# Altium PCB PCB1.PcbDoc
Units mm, origin at the board's own origin, x right, y up, seen from the top; angles counter-clockwise.
Board outline 30.99 x 36.45 mm, 2 copper layers (Top Layer, Bottom Layer); 8 components, 6 nets, 22 pads, 0 vias.
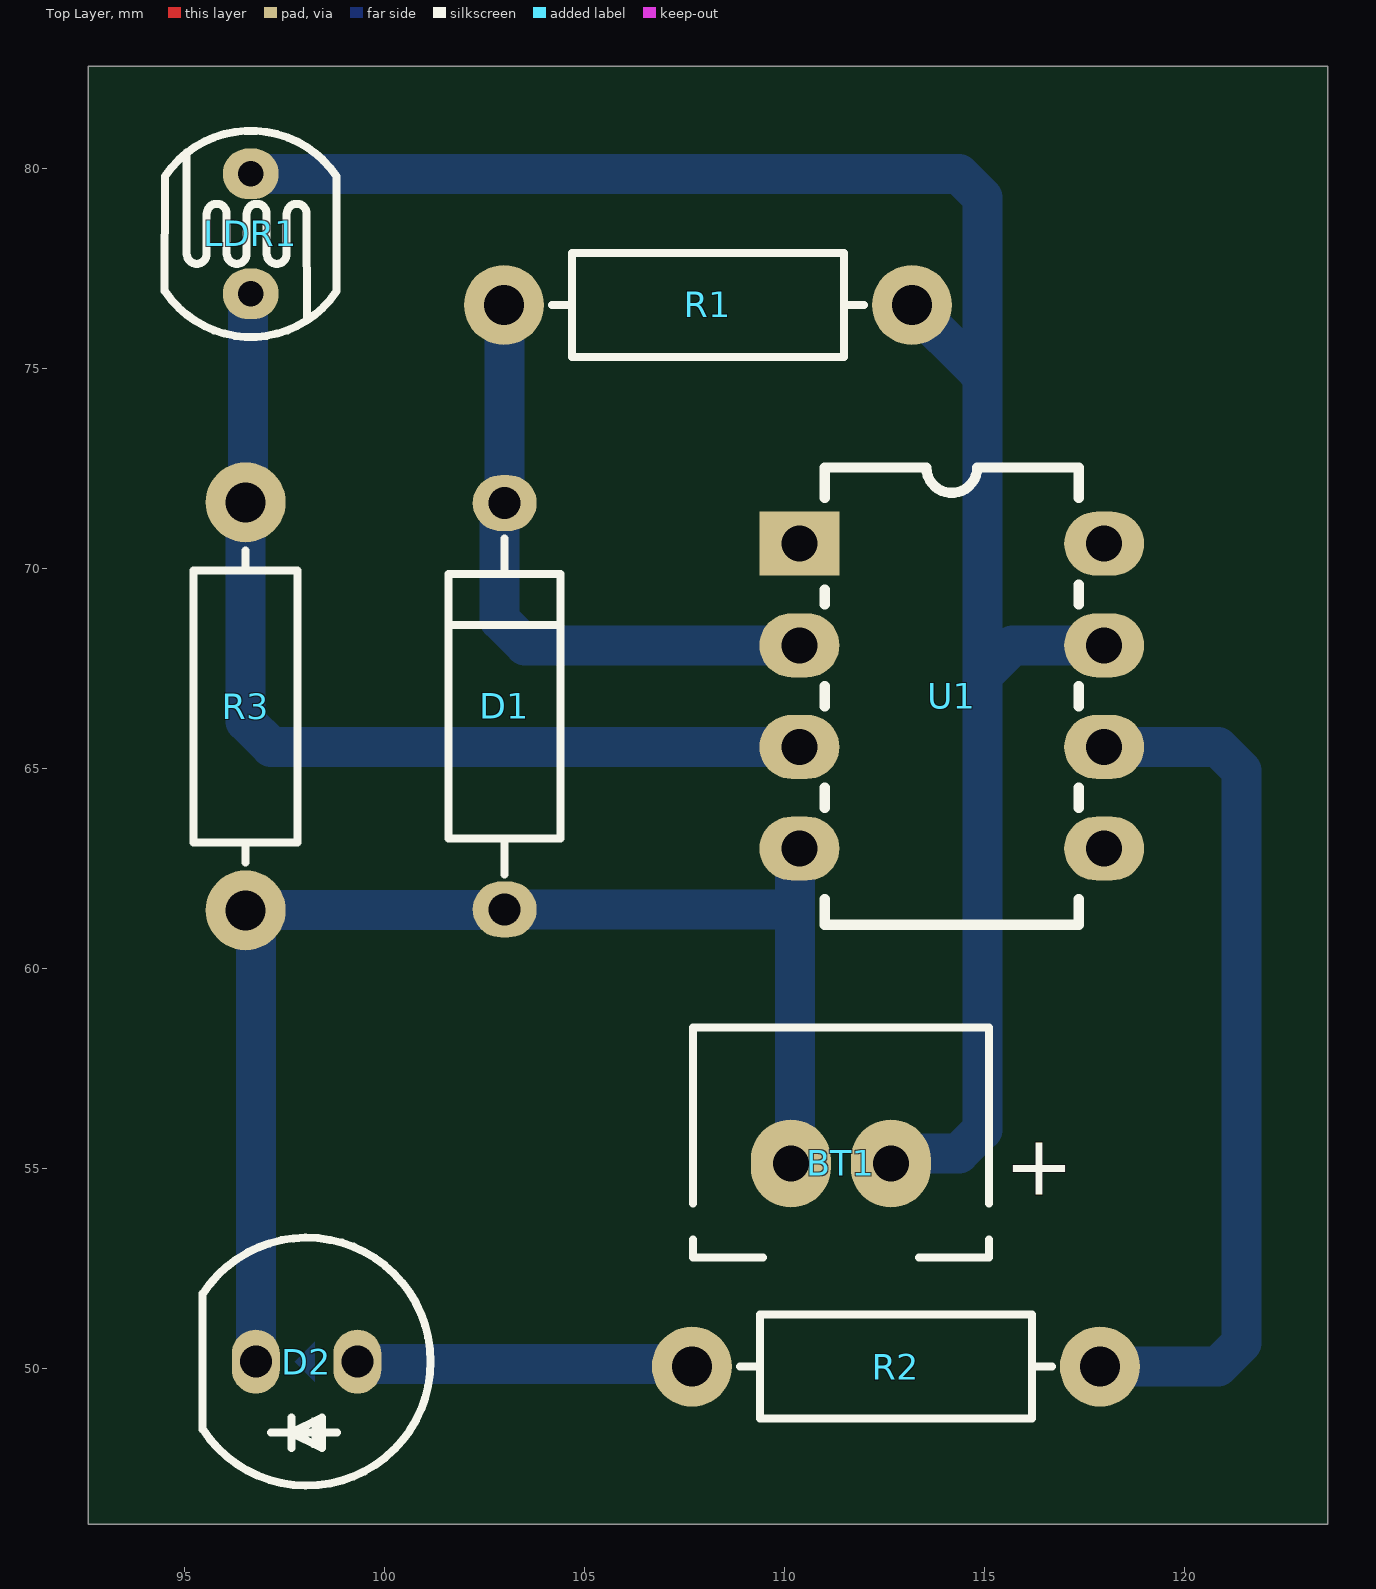
[diagram p0: Top Layer view]
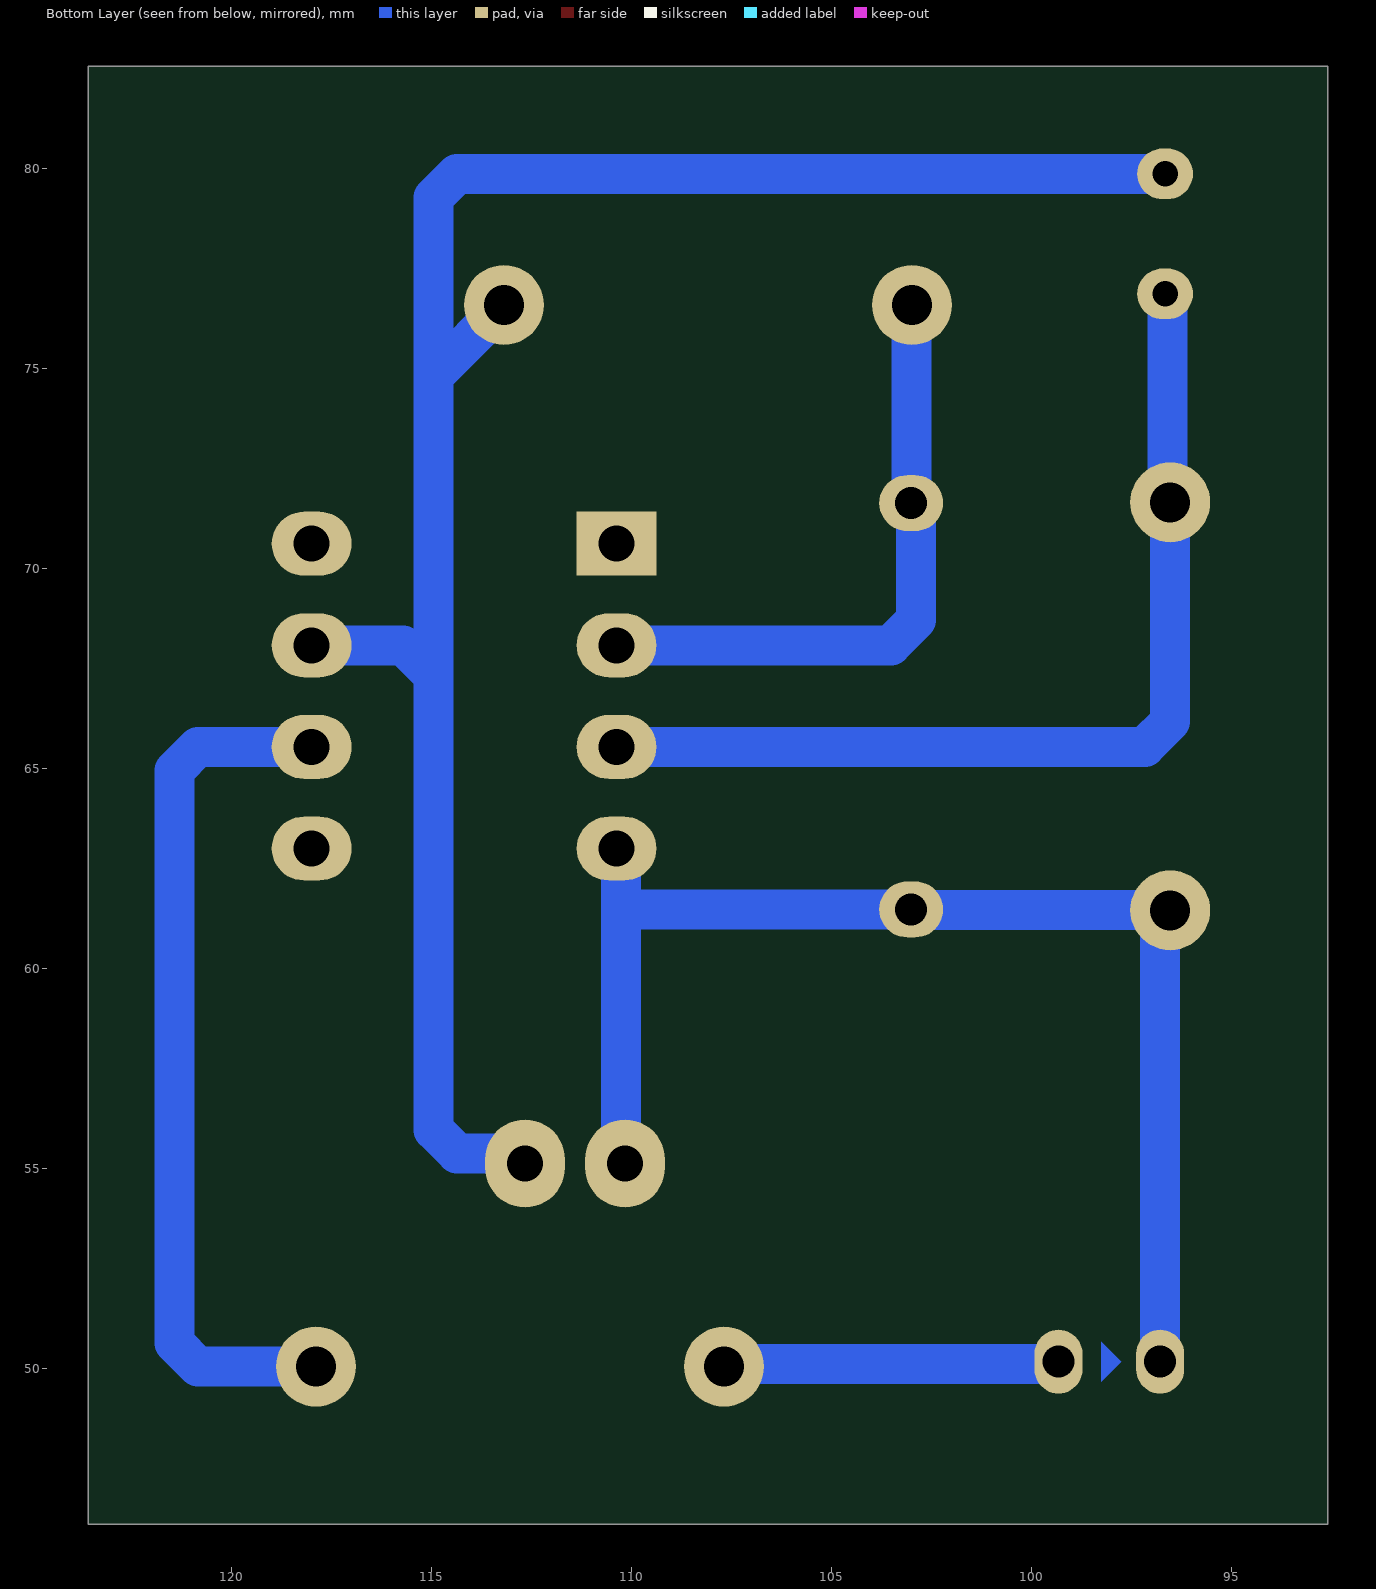
[diagram p1: Bottom Layer view, seen from below]
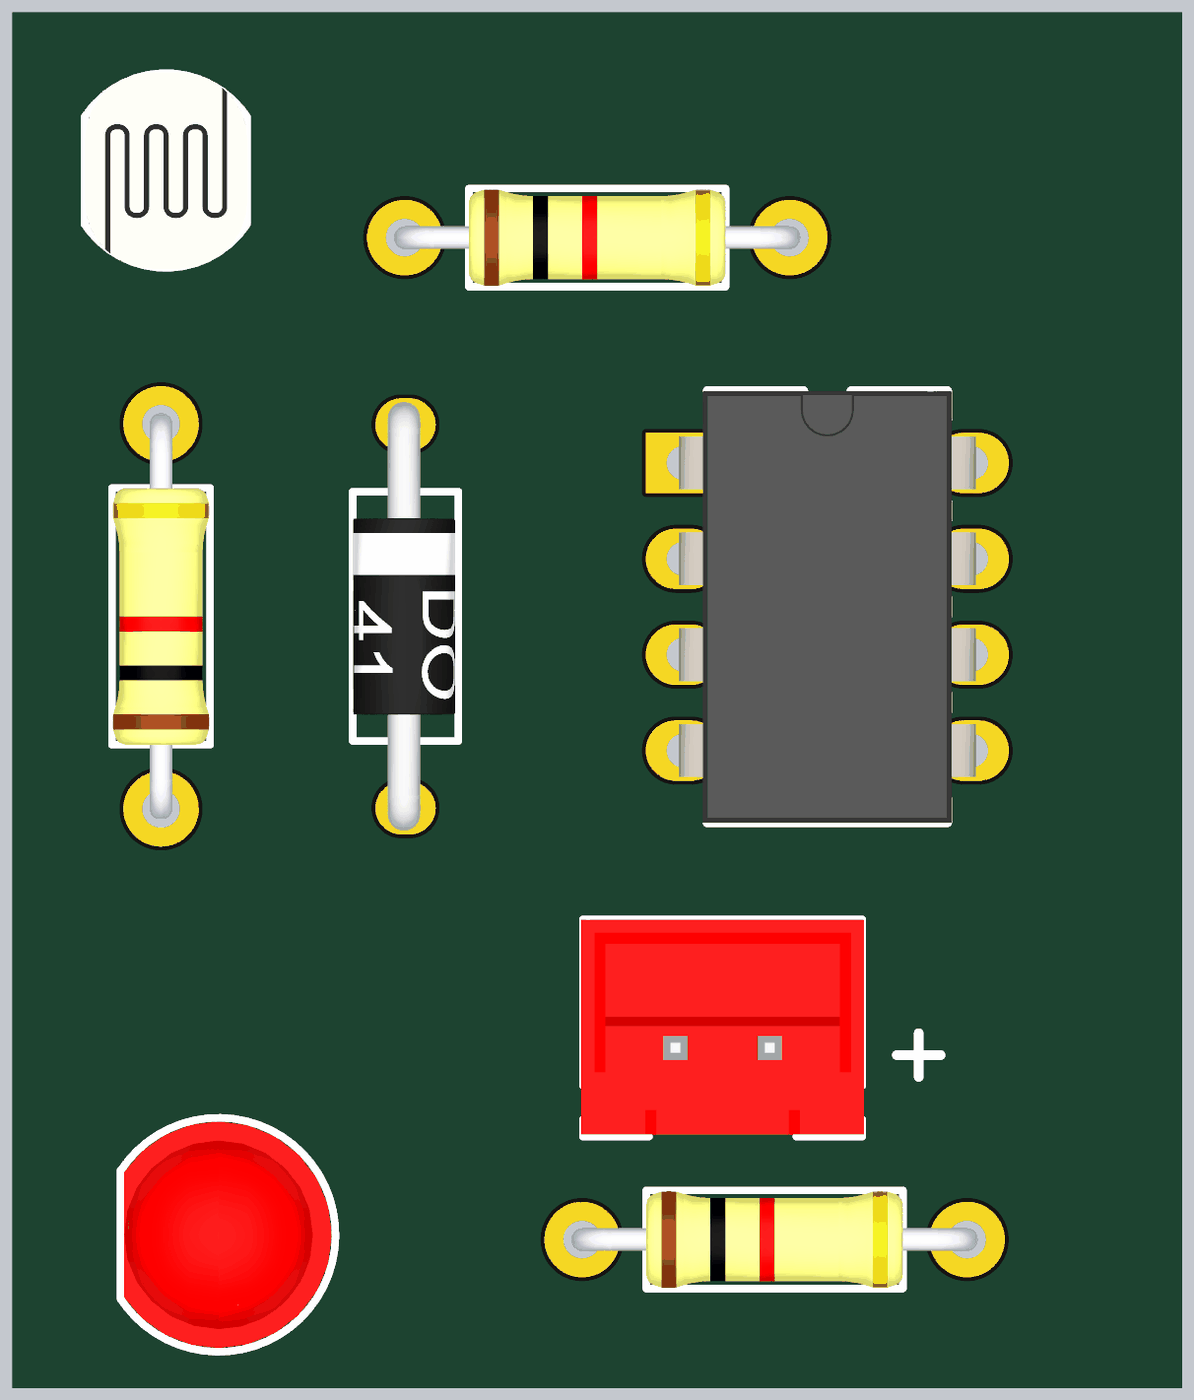
[diagram p2: 3D render of the assembled board from above, using the file's embedded part models]

## Layer stack, top to bottom
Top Solder: solder mask 0.0102, Solder Resist, Dk 3.5
Top Layer: signal copper 0.0356
Dielectric 1: dielectric 0.32, FR-4, Dk 4.8
Bottom Layer: signal copper 0.0356
Bottom Solder: solder mask 0.0102, Solder Resist, Dk 3.5

## Board outline
92.583,46.101 123.571,46.101 123.571,82.55 92.583,82.55

## Design rules (kind name [scope] priority, off if disabled: settings)
Clearance [All] p1: gap=0.254 ignorepadtopadclearanceinfootprint=FALSE
PolygonConnect [All] p1: connectstyle=Relief reliefconductorwidth=0.254 reliefentries=4 polygonreliefangle="90 Angle" airgapwidth=0.254
RoutingVias [All] p1: holewidth=0.711 width=1.27 viastyle="Through Hole" minholewidth=0.711 minwidth=1.27 maxholewidth=0.711 maxwidth=1.27
SolderMaskExpansion [All] p1: expansion=0.102 istentingtop=FALSE
Width [All] p1: maxlimit=1 minlimit=0.254 preferedwidth=1
30 further rules are at their usual default settings.

## Components (designator, comment, footprint, x,y, rotation, side; value= is the part's Value field where it differs from the comment)
BT1 "9V" XH02_Batt 110.149,55.118 r0 top
D1 "ZENER15V" D_AX04_DO41 102.997,66.548 r90 top
D2 "LED5MM_RED" LED5MM_RED 98.044,50.165 r180 top
LDR1 "PhotoCell" PhotoCell 96.647,78.359 r90 top
R1 "3.3K" R025W_AX04 108.077,76.581 r0 top
R2 "10K" R025W_AX04 112.776,50.038 r0 top
R3 "10K" R025W_AX04 96.52,66.548 r90 top
U1 "LM741" CDIP8 114.173,66.802 r0 top

## Footprints (in the part's own frame and the unit in brackets; to place one, negate y for a bottom-side part, rotate by r counter-clockwise, add the part's x,y. Pads: shape width x height; smd on the part's side, far side on the other; paste and mask are expansions set on the pad)
CDIP8 [mm] "8-Pin Ceramic DIP (DD8) NARROW_(300mil width) - 100mil pitch"
  rect 2x1.6 hole 0.9: 1(-3.81,3.81)
  oval 2x1.6 hole 0.9: 2(-3.81,1.27) 3(-3.81,-1.27) 4(-3.81,-3.81) 5(3.81,-3.81) 6(3.81,-1.27) 7(3.81,1.27) 8(3.81,3.81)
  silkscreen extent -3.17,-5.71 3.17,5.71, body extent -3.94,-5.71 3.93,5.71, height 4
D_AX04_DO41 [mm] "DIODE 0.4 INCH SPACING DO-41"
  oval 1.4x1.6 hole 0.8: 1(-5.08,0) 2(5.08,0)
  silkscreen extent -4.2,-1.4 4.2,1.4, body extent -5.68,-1.32 5.68,1.4, height 2.85
LED5MM_RED [mm] "LED THD 5MM RED"
  oval 1.2x1.6 hole 0.8: 1(-1.27,0) 2(1.27,0)
  Bottom Layer region: -0.2,0.5 -0.2,-0.5 0.3,0
  silkscreen extent -3.1,-3.1 2.6,3.1, body extent -3,-3 2.5,3, height 9.14
PhotoCell [mm]
  oval 1.27x1.397 hole 0.635: 1(-1.5,0) 2(1.5,0)
  silkscreen extent -2.58,-2.15 2.58,2.15, body extent -2.61,-2.16 2.61,2.14, height 2.44
R025W_AX04 [mm] "RESISTOR 1/4 WATT, AXIAL0.4"
  round 2 hole 1: 1(-5.1,0) 2(5.1,0)
  silkscreen extent -3.9,-1.3 3.9,1.3, body extent -5.38,-1.28 5.38,1.28, height 2.6
XH02_Batt [mm] "XH Connector, Body 2.5 x 7.4 mm"
  oval 2x2.2 hole 0.9: 1(2.5,0) 2(0,0)
  silkscreen extent -2.45,-2.35 4.95,3.4, body extent -2.5,-2.3 5,3.4, height 7

## Part data
BT1: library part Other_Elec_Battery, "Multicell Battery", Package=Package?, Rating=Rating?, Inflow=inflow?, Type=Type?, Validation=NT
D1: library part DIODE_THD_ZENER, "DIODE, ZENER, 0.2W, 15V", ASSEMBLY=ASSEMBLY, DESC=DESCRIPTION, MANF=Diodes, MANF_P#=ZENER15V, PARAM=15V, PARAM2=0.2W, PRICE=PRICE
D2: library part LED_THD_5MM_RED, "LED, THD, 5MM, RED", ASSEMBLY=ASSEMBLY, DESC=DESCRIPTION, MANF=MANF, MANF_P#=MANF_PART#, PARAM2=2.2V, PRICE=PRICE
LDR1: library part LDR, "Photo Cell- Variable Resistor With Light"
R1 R2 R3: library part RES_THD, "RESISTOR, THD", ASSEMBLY=ASSEMBLY, DESC=DESCRIPTION, DIST#=MOUSER, MANF="KOA SPEER", MANF_P#=RK73H1ETTP4701F, PARAM=0.063W, PARAM2=1%, PRICE="100= 0.5$"
U1: library part IC_Opamp_LF411CN, "Low offset, low drift JFET input operational amplifie", Package=Package?, Rating=Rating?, Inflow=1327, Type=Type?, Validation=NT

## Nets (pads, with @x,y where several pads share a name; then routed paths per layer and width w, separated by ;. In a path a pad name is that pad's centre, name@x,y a point inside that pad or via, vN(x,y) a via of type N, cw(c..) or ccw(c..) an arc to the next point about the centre after c; other vN are vias at no path point)
GND: BT1.2 D1.1 D2.2 R3.1 U1.4 | length 32.6
  Bottom Layer w1: D2.2 96.774,60.923 96.52,61.177 R3.1 96.53,61.458 102.987,61.458 D1.1 109.777,61.468 ; BT1.2 110.256,55.225 110.256,62.885 U1.4
NetBT1_1: BT1.1 LDR1.2 R1.2 U1.7 | length 50.2
  Bottom Layer w1: LDR1.2 114.349,79.859 114.935,79.273 114.935,67.31 ; BT1.1 112.903,55.372 114.349,55.372 114.935,55.958 114.935,67.31 ; R1.2 113.177,76.561 114.808,74.93 ; U1.7 115.697,68.072 114.935,67.31
NetD1_2: D1.2 R1.1 U1.2 | length 15.7
  Bottom Layer w1: R1.1 102.987,76.571 102.987,71.638 D1.2 102.87,71.501 102.87,68.707 103.505,68.072 U1.2
NetD2_1: D2.1 R2.1 | length 8.4
  Bottom Layer w1: D2.1 99.377,50.102 107.613,50.102 R2.1
NetLDR1_1: LDR1.1 R3.2 U1.3 | length 24.9
  Bottom Layer w1: LDR1.1 96.584,76.796 96.584,71.711 R3.2 96.52,66.167 97.155,65.532 U1.3
NetR2_2: R2.2 U1.6 | length 21.8
  Bottom Layer w1: R2.2 120.826,50.038 121.412,50.624 121.412,64.946 120.826,65.532 U1.6
pads on no net: U1.1 U1.5 U1.8

## Text inside footprints (layer, text, board x,y; h text height)
BT1: Top Overlay "+" at 115.483,54.331 h1.52